# EAGLE board Controller (EAGLE 9.6.2)
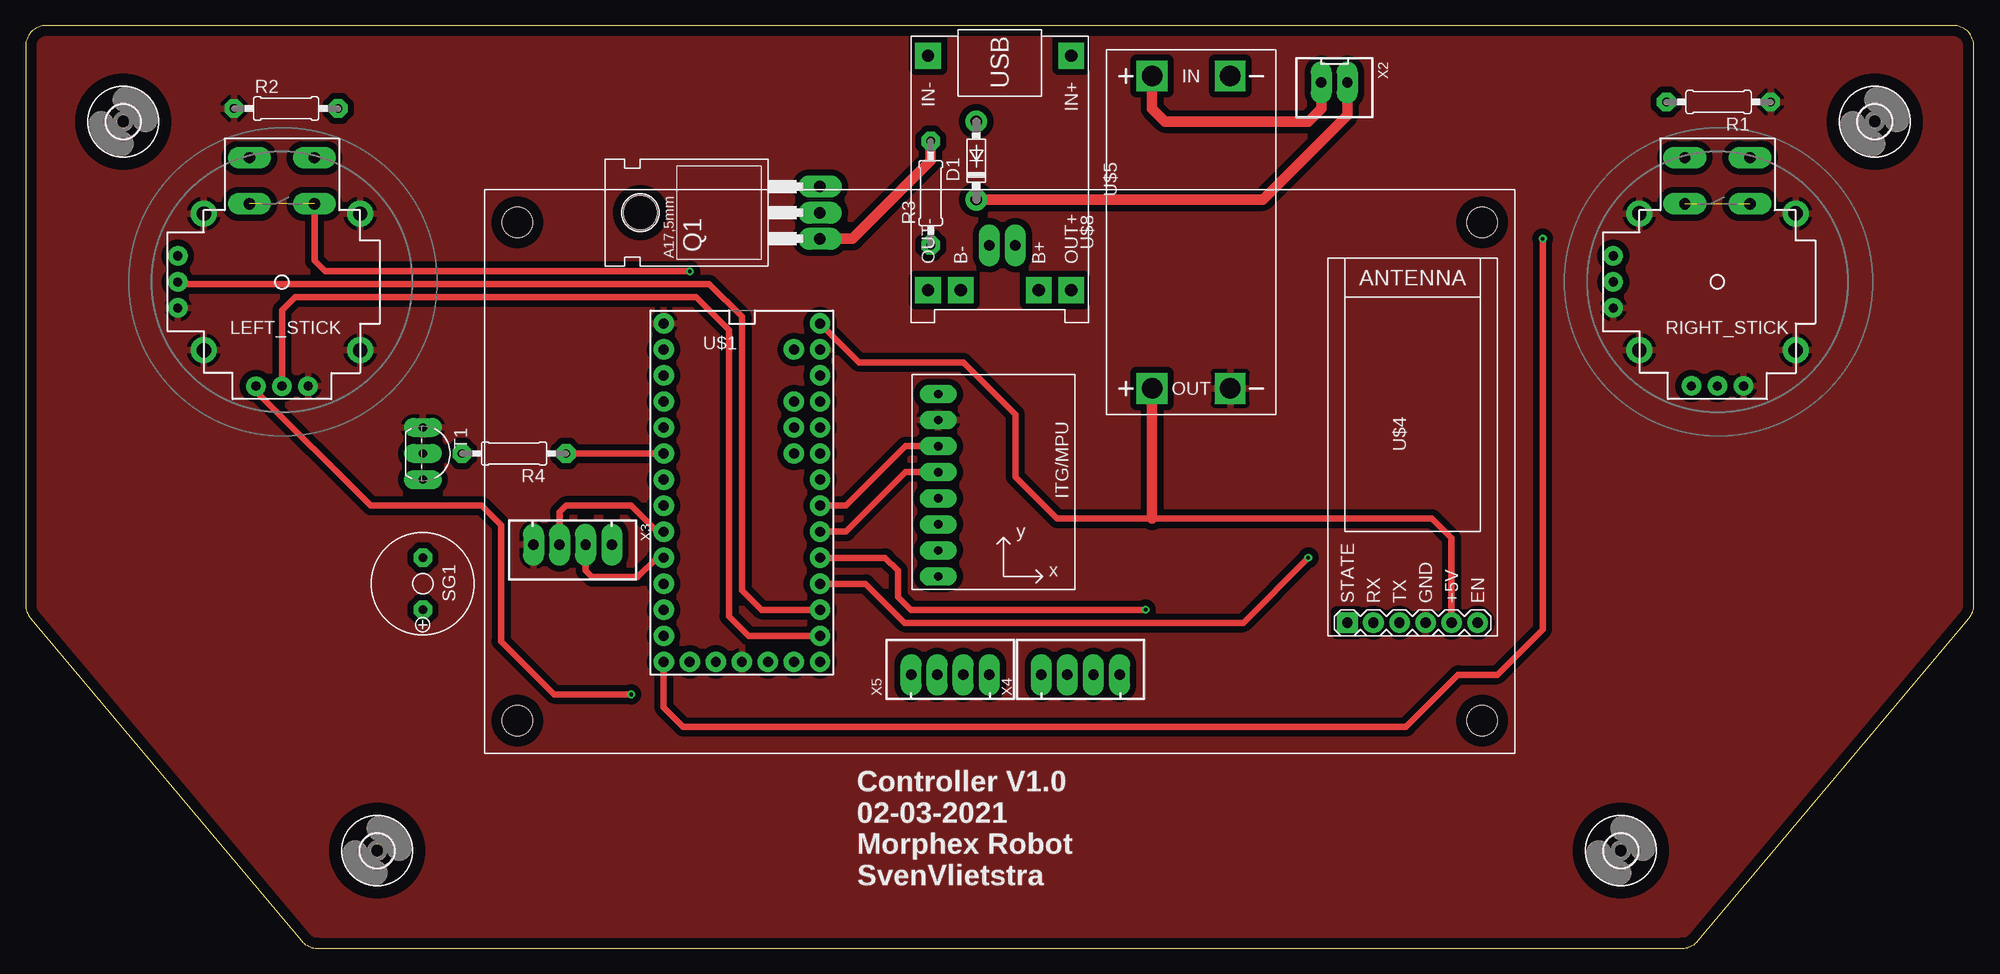
[diagram p0: board, top side]
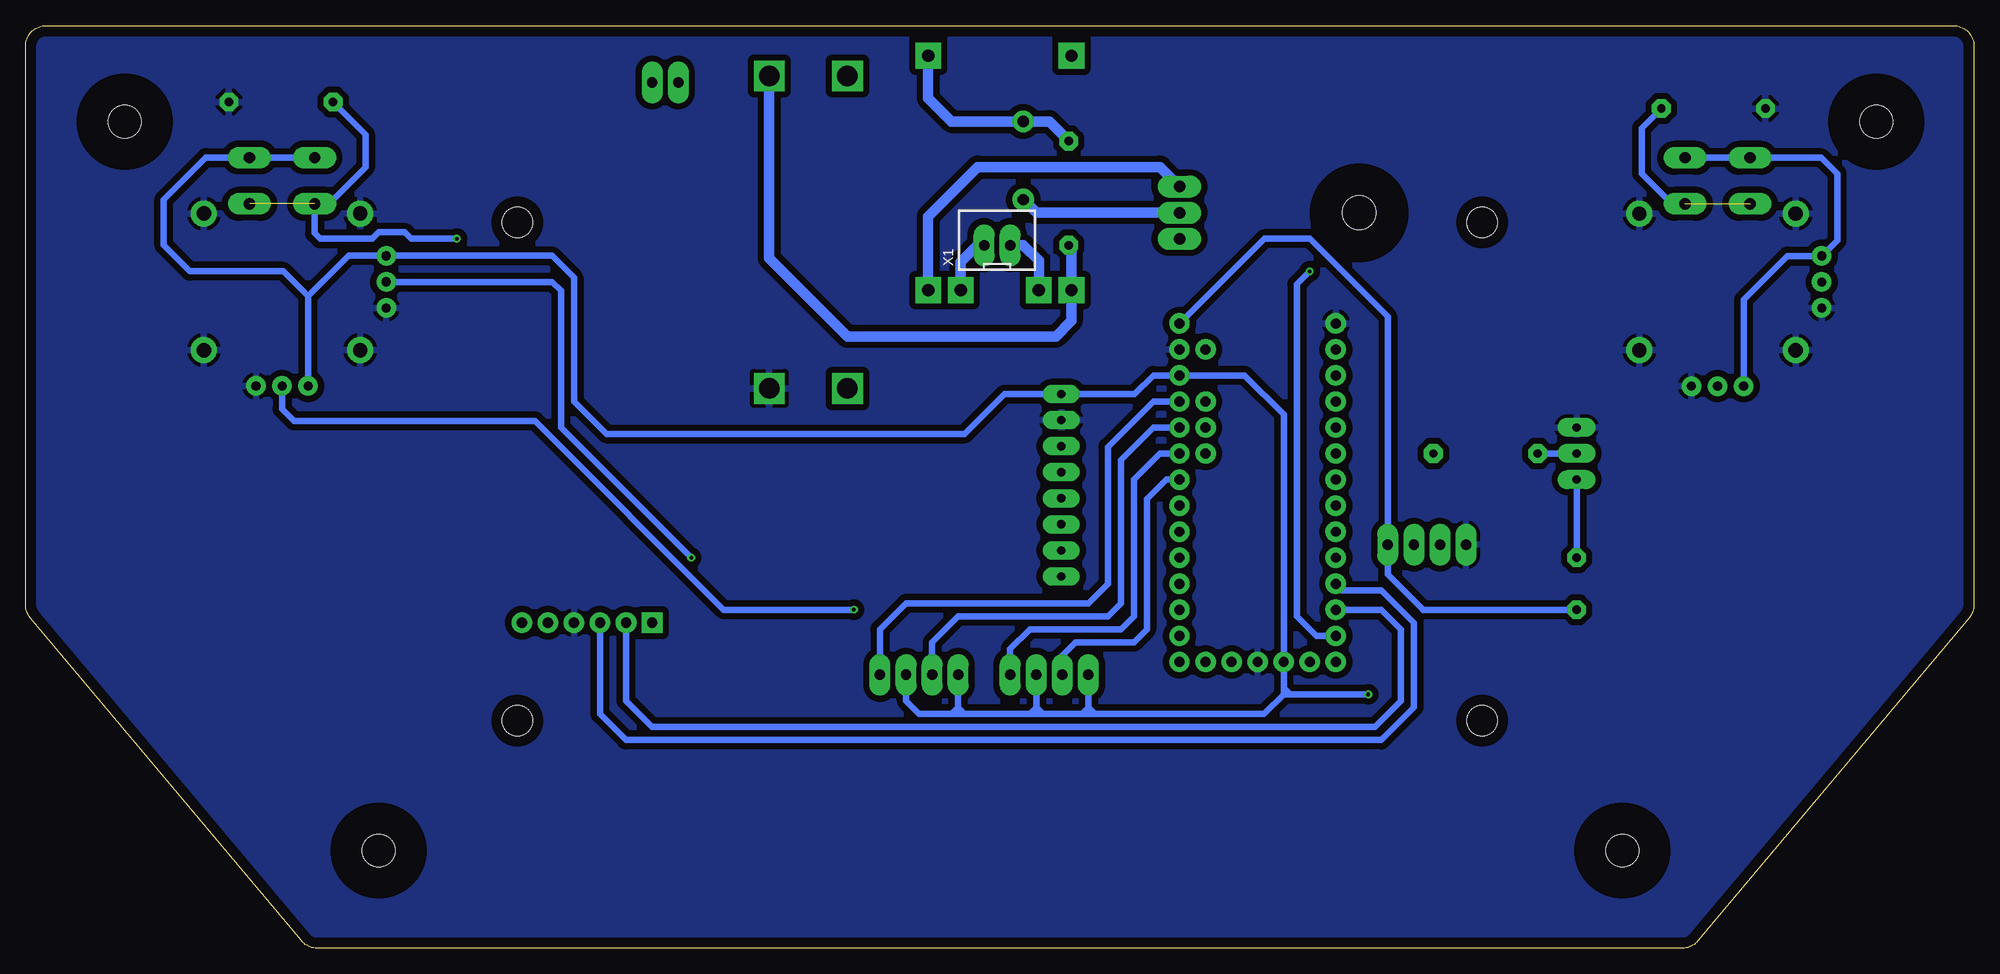
[diagram p1: board, bottom side, seen from below]

Size 190 x 90 mm. Coordinates in mm from the lower left corner, seen from the top.
Outline: 189.53,32.22 arc40 190,33.5 190,88 arc90 188,90 2,90 arc90 0,88 0,33.5 arc40 0.47,32.22 26.9,0.71 arc50 28.43,0 161.57,0 arc50 163.1,0.71 189.53,32.22
Copper layers (1*16): Top 0.035mm / dielectric 1.5mm / Bottom 0.035mm
Design rules "default *": minimum track width 6mil, minimum drill 0.35mm, track to track 6mil, track to pad 6mil, pad to pad 6mil, via to via 6mil, smd to smd 6mil, copper to edge 40mil, drill to drill 6mil, minimum pad ring 20mil, minimum via ring 8mil, stop-mask expansion 4mil, vias tented up to drill 0mil, thermal gap 15mil

## Footprints (pad centres in the part's own frame; a part is rotated, then mirrored left to right if it is on the bottom)
DO41-7.6 = drill 1.1 pad 1.7: A 3.81,0; C -3.81,0
JOYSTICK = drill 1.1 pad 1.778 long: B1A -3.175,12.12; B1B 3.175,12.12; B2A -3.175,7.62; B2B 3.175,7.62 | drill 0.889 pad 1.778: H1 -2.54,-10.16; H2 0,-10.16; H3 2.54,-10.16; V1 -10.16,2.54; V2 -10.16,0; V3 -10.16,-2.54 | drill 1.397 pad 2.54: MOUNT1 -7.62,6.668; MOUNT2 -7.62,-6.668; MOUNT3 7.62,-6.668; MOUNT4 7.62,6.668
TO220BH = drill 1.118 long: D 0,-6.35; G -2.54,-6.35; S 2.54,-6.35 | hole 3.302: 0,11.176
0207/10 = drill 0.813 octagon: 1 -5.08,0; 2 5.08,0
5MM = drill 0.8 pad 1.778 octagon: P$1 -2.54,0; P$2 2.54,0
TO92-EBC = drill 0.813 long: B 0,-1.27; C 2.54,-1.27; E -2.54,-1.27
GY-521 = drill 0.8 pad 1.778 long: ADO -8.89,-6.35; GND -8.89,6.35; INT -8.89,-8.89; SCL -8.89,3.81; SDA -8.89,1.27; VCC -8.89,8.89; XCL -8.89,-3.81; XDA -8.89,-1.27
TEENSY_3.0-3.2&LC_ALL_PINS = drill 0.965: 0 -7.62,13.97; 1 -7.62,11.43; 2 -7.62,8.89; 3 -7.62,6.35; 3.3V 7.62,11.43; 3.3V1 -2.54,-16.51; 4 -7.62,3.81; 5 -7.62,1.27; 6 -7.62,-1.27; 7 -7.62,-3.81; 8 -7.62,-6.35; 9 -7.62,-8.89; 10 -7.62,-11.43; 11 -7.62,-13.97; 12 -7.62,-16.51; 13 7.62,-16.51; 14/A0 7.62,-13.97; 15/A1 7.62,-11.43; 16/A2 7.62,-8.89; 17/A3 7.62,-6.35; 18/A4 7.62,-3.81; 19/A5 7.62,-1.27; 20/A6 7.62,1.27; 21/A7 7.62,3.81; 22/A8 7.62,6.35; 23/A9 7.62,8.89; A10 5.08,6.35; A11 5.08,3.81; AGND 7.62,13.97; AREF 5.08,8.89; GND -7.62,16.51; GND1 0,-16.51; PGM 2.54,-16.51; RESET/DAC 5.08,-16.51; VBAT -5.08,-16.51; VIN 7.62,16.51; VUSB 5.08,13.97
3,2 = hole 3.2: 0,0
WIRELESS-BLUETOOTH-HC-05 = drill 1 square: 1 -6.35,-17.145 | drill 1: 2 -3.81,-17.145; 3 -1.27,-17.145; 4 1.27,-17.145; 5 3.81,-17.145; 6 6.35,-17.145
BATTERY-CHARGER-LI-PROT = drill 1.2 pad 2.5 square: B+ 10.795,3.81; B- 10.795,-3.81; IN+ -12.065,6.985; IN- -12.065,-6.985; OUT+ 10.795,6.985; OUT- 10.795,-6.985
DC-DC-STEP-UP-MT3608 = drill 2 pad 2.8 square: IN+ 15.24,3.81; IN- 15.24,-3.81; OUT+ -15.24,3.81; OUT- -15.24,-3.81
NX4832K035 = hole 3: -47.05,24.3; -47.05,-24.3; 47.05,24.3; 47.05,-24.3
JST-XH-02-PACKAGE-LONG-PAD = drill 1.016 long: 1 -1.27,0; 2 1.27,0
JST-XH-04-PACKAGE-LONG-PAD = drill 1.016 long: 1 -3.81,0; 2 -1.27,0; 3 1.27,0; 4 3.81,0

## Placement (x,y rotation side)
D1  1N5819-B  [DO41-7.6]  92.71,76.83 90 top
LEFT_STICK  JOYSTICKPTH  [JOYSTICK]  25,65 0 top
Q1  NDP6020P  [TO220BH]  71.12,71.75 90 top
R1  10k  [0207/10]  165.1,82.55 180 top
R2  10k  [0207/10]  25.4,81.92 0 top
R3  10K  [0207/10]  88.27,73.66 90 top
R4  2K2  [0207/10]  47.62,48.26 180 top
RIGHT_STICK  JOYSTICKPTH  [JOYSTICK]  165,65 0 top
SG1  Buzzer  [5MM]  38.73,35.56 270 top
T1  [TO92-EBC]  40.01,48.26 270 top
U1  GY-521MPU6050  [GY-521]  97.89,45.16 0 top
U$1  TEENSY_LC_ALL_PINS  [TEENSY_3.0-3.2&LC_ALL_PINS]  69.85,44.44 0 top
U$2  [3,2]  9.53,80.64 0 top
U$3  [3,2]  180.34,80.64 0 top
U$4  WIRELESS-BLUETOOTH-HC-05  [WIRELESS-BLUETOOTH-HC-05]  135.25,48.9 0 top
U$5  BATTERY-CHARGER-LI-PROT  [BATTERY-CHARGER-LI-PROT]  95,75 270 top
U$6  [3,2]  34.29,9.53 0 top
U$7  [3,2]  155.57,9.53 0 top
U$8  DC-DC-STEP-UP-MT3608  [DC-DC-STEP-UP-MT3608]  113.67,69.85 90 top
U$9  NX4832K035  [NX4832K035]  95,46.5 0 top
X1  Battery  [JST-XH-02-PACKAGE-LONG-PAD]  95.25,68.58 0 bottom
X2  Switch  [JST-XH-02-PACKAGE-LONG-PAD]  127.64,84.45 180 top
X3  Nextion  [JST-XH-04-PACKAGE-LONG-PAD]  53.34,39.37 180 top
X4  BUT_L  [JST-XH-04-PACKAGE-LONG-PAD]  102.87,26.67 0 top
X5  BUT_R  [JST-XH-04-PACKAGE-LONG-PAD]  90.17,26.67 0 top

## Library data of the parts
D1 = diode
LEFT_STICK RIGHT_STICK = adafruit; SPICEPREFIX: X
Q1 = transistor-power
R1-R4 = rcl; SPICEPREFIX: R
SG1 = buzzer
T1 = transistor
U1 = gy-521
U$1 = Teensy_3_and_LC_Series_Boards_v1.4
U$2 U$3 U$6 U$7 = holes
U$4 U$5 U$8 = TP4056
U$9 = Nextion
X1-X5 = Rembrandt Electronics - JST XH Connectors v1-0

## Nets
26/A12/DAC: U$1.RESET/DAC
+3V3: LEFT_STICK.B1A LEFT_STICK.B1B LEFT_STICK.H1 LEFT_STICK.V1 RIGHT_STICK.B1A RIGHT_STICK.B1B RIGHT_STICK.H1 RIGHT_STICK.V1 U1.VCC U$1.3.3V U$1.3.3V1 X4.1 X4.3 X5.1 X5.3
+5V: SG1.P$2 U$1.VIN U$4.5 U$8.OUT+ X3.1
AREF: U$1.AREF
BL_RX: U$1.10 U$4.2
BL_STATE: U$4.1
BL_TX: U$1.9 U$4.3
BUT_1: U$1.22/A8 X4.2
BUT_2: U$1.23/A9 X4.4
BUT_3: U$1.20/A6 X5.2
BUT_4: U$1.21/A7 X5.4
BUZZER: R4.1 U$1.4
GND: LEFT_STICK.H3 LEFT_STICK.MOUNT1 LEFT_STICK.MOUNT2 LEFT_STICK.MOUNT3 LEFT_STICK.MOUNT4 LEFT_STICK.V3 R1.1 R2.1 RIGHT_STICK.H3 RIGHT_STICK.MOUNT1 RIGHT_STICK.MOUNT2 RIGHT_STICK.MOUNT3 RIGHT_STICK.MOUNT4 RIGHT_STICK.V3 T1.E U1.GND U$1.AGND U$1.GND U$1.GND1 U$4.4 U$8.OUT- X3.4
GY_SCL: U1.SCL U$1.19/A5
GY_SDA: U1.SDA U$1.18/A4
N$1: R3.1 U$5.OUT- U$8.IN-
N$2: U$5.B+ X1.1
N$3: U$5.B- X1.2
N$4: D1.C Q1.D X2.1
N$5: Q1.S U$5.OUT+
N$6: U$8.IN+ X2.2
N$7: R4.2 T1.B
N$8: SG1.P$1 T1.C
N$9: D1.A Q1.G R3.2 U$5.IN+
NEX_RX: U$1.8 X3.2
NEX_TX: U$1.7 X3.3
SW1: LEFT_STICK.B2A LEFT_STICK.B2B R2.2 U$1.11
SW2: R1.2 RIGHT_STICK.B2A RIGHT_STICK.B2B U$1.12
VUSB: U$1.VUSB
X-AXIS1: LEFT_STICK.V2 U$1.15/A1
X-AXIS2: RIGHT_STICK.V2 U$1.16/A2
Y-AXIS1: LEFT_STICK.H2 U$1.14/A0
Y-AXIS2: RIGHT_STICK.H2 U$1.17/A3

## Tracks (layer width: path | path; a pad name or v marks a point on that pad's centre or on a via)
+3V3  (via drill 0.35)
  Top 0.61: LEFT_STICK.H1 22.46,54.38 33.66,43.18 44.45,43.18 46.35,41.27 46.35,29.94 51.53,24.77 v59.05,24.77
  Bottom 0.61: RIGHT_STICK.H1 162.46,63.6 | 162.46,63.6 158.52,67.54 RIGHT_STICK.V1 138.66,67.54 136.53,65.41 136.53,53.34 133.35,50.16 98.42,50.16 94.54,54.05 U1.VCC 81.84,54.05 80.01,55.88 U$1.3.3V | 162.46,63.6 164.89,66.04 173.99,66.04 176.53,68.58 176.53,73.03 172.43,77.12 RIGHT_STICK.B1B RIGHT_STICK.B1A | U$1.3.3V | LEFT_STICK.H1 22.46,63.27 18.19,67.54 LEFT_STICK.V1 13.34,69.04 13.34,75.56 14.89,77.12 LEFT_STICK.B1A LEFT_STICK.B1B | 67.31,24.77 67.31,25.4 | 67.31,25.4 U$1.3.3V1 67.31,52.07 71.12,55.88 U$1.3.3V | 67.31,24.77 69.22,22.86 85.72,22.86 | v59.05,24.77 v59.06,24.77 66.67,24.77 | 66.67,24.77 67.31,24.77 | 66.67,24.77 67.31,25.4 | 85.72,22.86 86.36,22.86 | 86.36,22.86 87,22.86 | 87,22.86 90.81,22.86 | 90.81,22.86 91.44,22.86 | 91.44,22.86 92.08,22.86 | 92.08,22.86 98.42,22.86 | 98.42,22.86 99.06,22.86 | 99.06,22.86 99.69,22.86 | 99.69,22.86 102.87,22.86 104.14,24.13 X4.3 | X4.1 99.06,23.5 | 99.06,23.5 99.06,22.86 | X5.3 91.44,23.5 | 91.44,23.5 91.44,22.86 | X5.1 86.36,23.5 | 86.36,23.5 86.36,22.86 | 86.36,23.5 85.72,22.86 | 86.36,23.5 87,22.86 | 91.44,23.5 90.81,22.86 | 91.44,23.5 92.08,22.86 | 99.06,23.5 99.69,22.86 | 99.06,23.5 98.42,22.86
+5V
  Top 0.61: U$1.VIN 81.28,57.14 91.45,57.14 96.52,52.07 96.52,45.99 100.6,41.91 109.86,41.91 137.16,41.91 139.06,40.01 U$4.5
  Top 1.016: U$8.OUT+ 109.86,41.91
  Bottom 0.61: U$1.VIN 69.21,69.22 64.77,69.22 57.15,61.59 X3.1 57.15,36.46 53.84,33.15 53.71,33.02 SG1.P$2
  Bottom 1.016: U$1.VIN
BL_RX
  Bottom 0.61: U$1.10 57.78,33.01 55.88,31.11 55.88,24.13 58.42,21.59 128.91,21.59 131.44,24.13 U$4.2
BL_TX
  Bottom 0.61: U$1.9 61.59,34.92 57.79,34.92 57.78,34.92 54.61,31.75 54.61,23.5 57.78,20.32 131.44,20.32 133.99,22.86 U$4.3
BUT_1
  Bottom 0.61: U$1.22/A8 80.02,50.79 83.19,47.62 83.19,33.66 84.45,32.38 99.06,32.38 101.6,29.84 X4.2
BUT_2
  Bottom 0.61: U$1.23/A9 80.02,53.33 84.45,48.9 84.45,35.56 86.36,33.66 104.14,33.66 106.68,31.11 X4.4
BUT_3
  Bottom 0.61: U$1.20/A6 78.75,45.71 80.64,43.81 80.64,31.11 81.92,29.84 87.63,29.84 88.9,28.57 X5.2
BUT_4
  Bottom 0.61: U$1.21/A7 79.38,48.25 81.92,45.72 81.92,32.38 83.19,31.11 92.08,31.11 93.98,29.21 X5.4
BUZZER
  Top 0.61: R4.1 U$1.4
GND
  pour Bottom (isolate 0.61): 0.64,89.53 189.38,89.53 189.79,41.41 189.87,33.02 162.36,0.64 27.94,0.64 0.64,33.02
  pour Top (isolate 0.61): 0,90.17 190.5,90.17 190.5,33.02 161.7,-0.1 161.7,-0.1 27.94,0 -0.64,34.56 -0.64,89.53
GY_SCL
  Top 0.61: U$1.19/A5 80.01,43.18 85.8,48.97 U1.SCL
GY_SDA
  Top 0.61: U$1.18/A4 80.01,40.64 85.8,46.43 U1.SDA
N$1
  Bottom 1.016: R3.1 88.01,68.33 U$5.OUT- 88.01,61.22 89.53,59.69 109.86,59.69 117.47,67.31 U$8.IN-
N$2
  Bottom 1.016: X1.1 97.16,68.58 98.81,66.93 U$5.B+
N$3
  Bottom 1.016: U$5.B- 91.19,67.06 92.71,68.58 X1.2
N$4
  Top 1.016: D1.C 120.65,73.03 128.91,81.28 X2.1
  Bottom 1.016: D1.C 91.44,71.75 Q1.D
N$5
  Bottom 1.016: Q1.S 79.38,76.2 97.16,76.2 101.98,71.38 U$5.OUT+
N$6
  Top 1.016: U$8.IN+ 109.86,81.92 111.12,80.64 125.09,80.64 126.36,81.92 X2.2
N$7
  Bottom 0.61: T1.B R4.2
N$8
  Bottom 0.61: T1.C SG1.P$1
N$9
  Top 1.016: Q1.G 80.64,69.22 88.27,76.83 R3.2
  Bottom 1.016: 102.16,87.07 U$5.IN+ 101.98,82.93 99.69,80.64 D1.A 90.17,80.64 R3.2
NEX_RX
  Top 0.61: X3.2 54.61,36.83 55.24,36.2 59.69,36.2 61.59,38.09 U$1.8
NEX_TX
  Top 0.61: U$1.7 61.6,40.63 59.05,43.18 52.7,43.18 52.07,42.55 X3.3
SW1  (via drill 0.35)  (1 unrouted)
  Top 0.61: v64.77,66.04 29.21,66.04 28.17,67.08 LEFT_STICK.B2B
  Bottom 0.61: LEFT_STICK.B2B 29.44,72.62 32.38,75.56 32.38,80.01 R2.2 | U$1.11 64.14,30.48 66.04,32.38 66.04,64.77 v64.77,66.04
SW2  (via drill 0.35)  (1 unrouted)
  Top 0.61: U$1.12 62.23,23.5 64.14,21.59 134.62,21.59 139.7,26.67 143.51,26.67 147.96,31.11 v147.96,69.22
  Bottom 0.61: R1.2 156.84,79.38 156.84,76.2 160.42,72.62 RIGHT_STICK.B2A 161.82,69.75 161.29,69.22 156.21,69.22 155.57,69.85 153.03,69.85 152.4,69.22 v147.96,69.22
X-AXIS1
  Top 0.61: LEFT_STICK.V2 15.24,65 15.47,64.77 66.67,64.77 69.85,61.59 69.85,34.92 71.76,33.01 U$1.15/A1
X-AXIS2  (via drill 0.35)
  Top 0.61: U$1.16/A2 81.92,35.55 85.72,31.75 118.75,31.75 v125.09,38.1
  Bottom 0.61: RIGHT_STICK.V2 138.66,65 137.79,64.14 137.79,50.8 v125.09,38.1
Y-AXIS1
  Top 0.61: LEFT_STICK.H2 25,62.23 26.27,63.5 65.41,63.5 68.58,60.33 68.58,32.38 70.49,30.47 U$1.14/A0
Y-AXIS2  (via drill 0.35)
  Top 0.61: U$1.17/A3 83.83,38.09 85.09,36.83 85.09,34.29 86.36,33.02 v109.22,33.02
  Bottom 0.61: RIGHT_STICK.H2 165,52.6 163.83,51.44 140.34,51.44 121.92,33.02 v109.22,33.02

## Text on the board
tPlace: Controller V1.0 / 02-03-2021 / Morphex Robot / SvenVlietstra